# Altium PCB Flyback_Converter_New.PcbDoc
Units mil, origin at the board's own origin, x right, y up, seen from the top; angles counter-clockwise.
Board outline 3780.03 x 2215.03 mil, 2 copper layers (Top Layer, Bottom Layer); 31 components, 15 nets, 79 pads, 0 vias.
Unrouted connection lines stored in the file: 3.
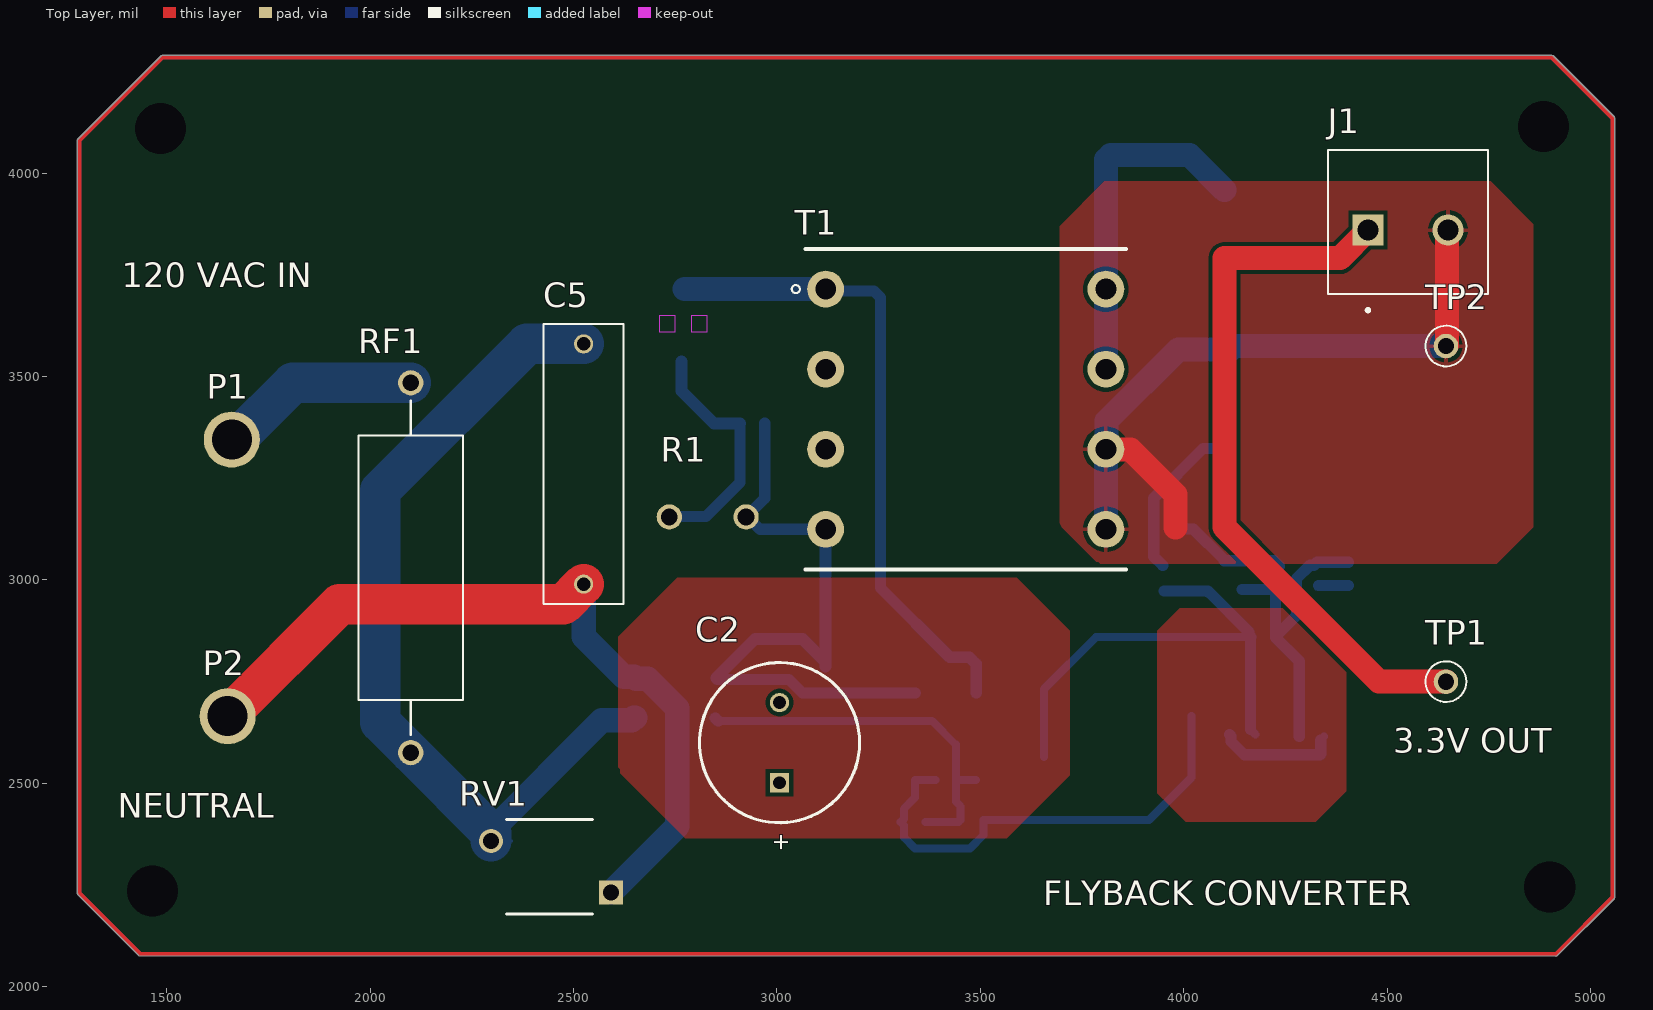
[diagram p0: Top Layer view]
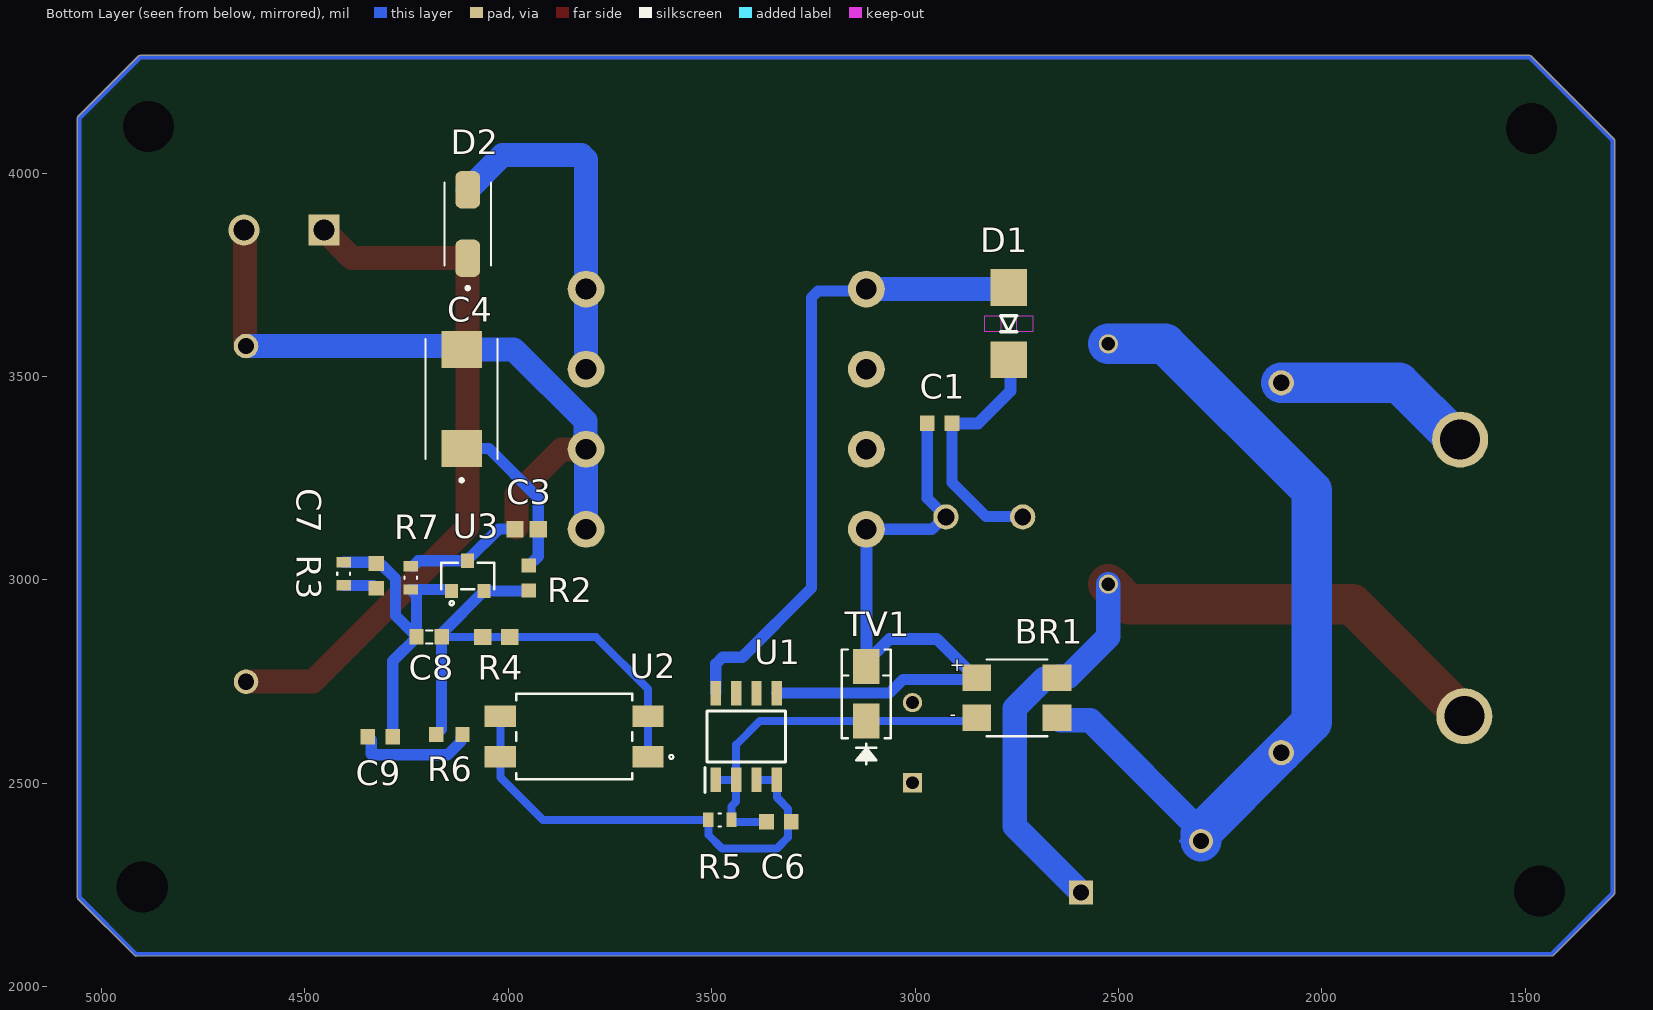
[diagram p1: Bottom Layer view, seen from below]
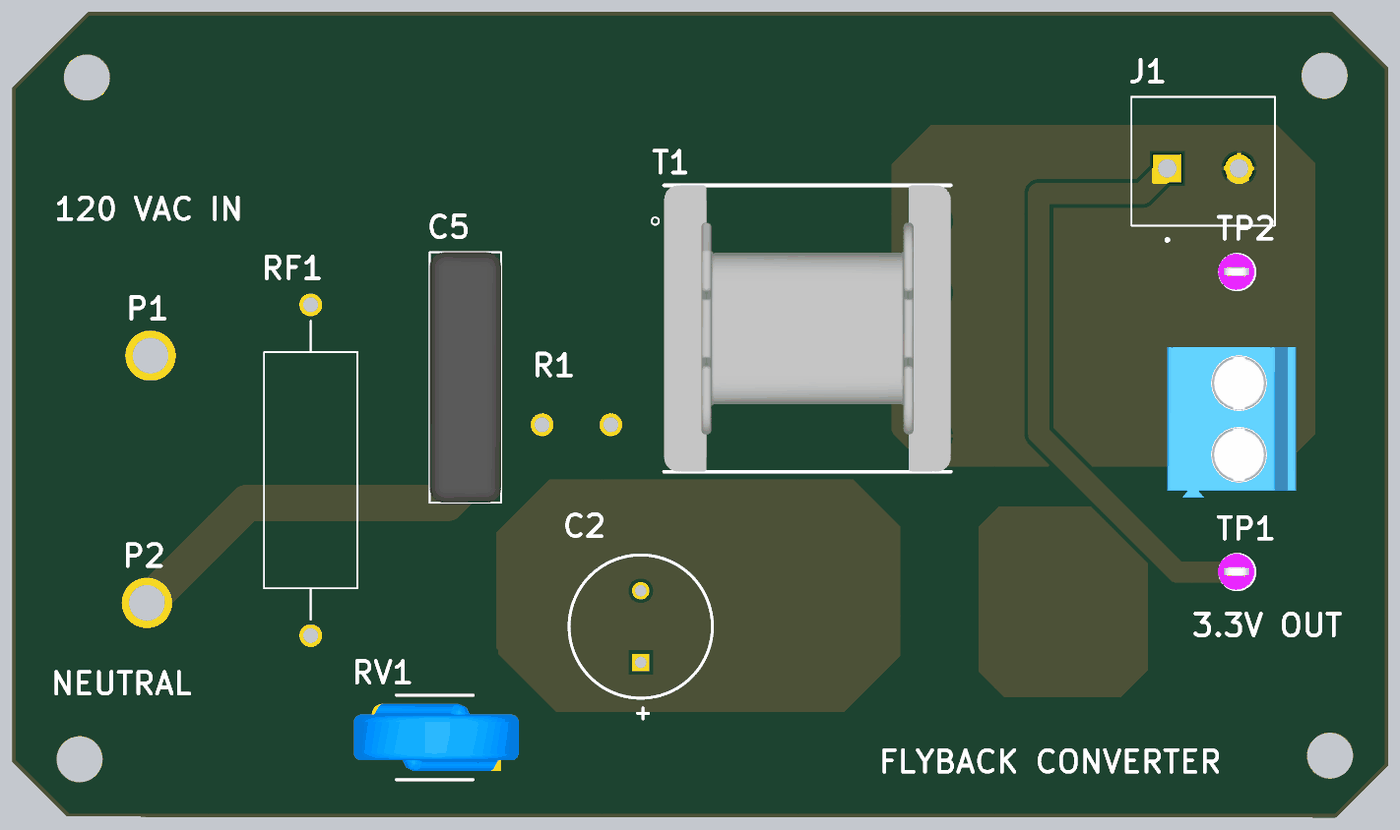
[diagram p2: 3D render of the assembled board from above, using the file's embedded part models]
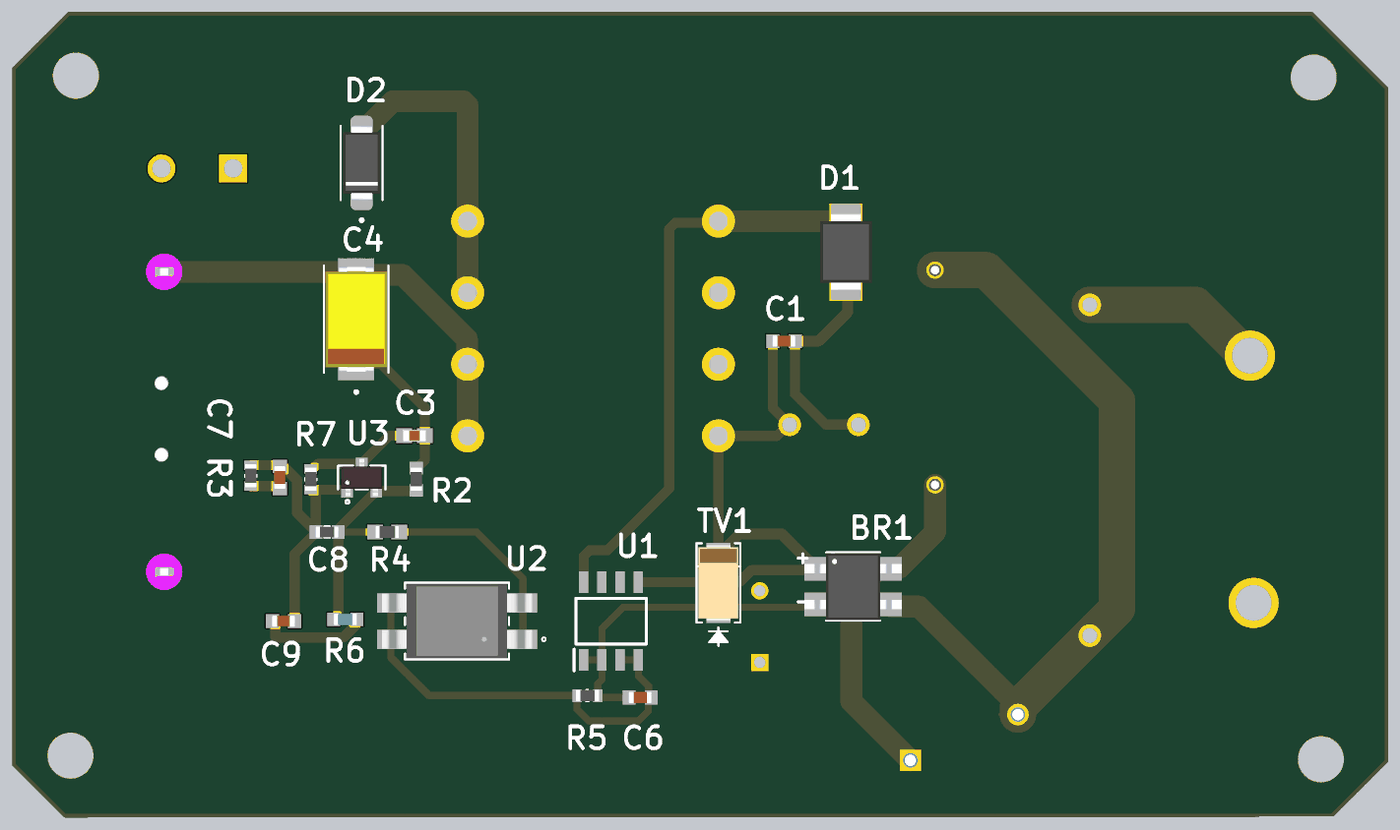
[diagram p3: 3D render of the assembled board from below, using the file's embedded part models]

## Layer stack, top to bottom
Top Solder: solder mask 0.4, Solder Resist, Dk 3.5
Top Layer: signal copper 1.4
Dielectric 1: dielectric 12.6, FR-4, Dk 4.8
Bottom Layer: signal copper 1.4
Bottom Solder: solder mask 0.4, Solder Resist, Dk 3.5

## Board outline
1431.45,2076.45 1281.45,2226.45 1279.98,2230 1279.98,4080 1281.45,4083.55 1486.45,4288.55 1490,4290.02 4905,4290.02 4908.55,4288.55 5058.55,4138.55 5060.02,4135 5060.02,2220 5058.55,2216.45 4918.55,2076.45 4915,2074.99

## Design rules (kind name [scope] priority, off if disabled: settings)
Clearance [All] p1: gap=10 ignorepadtopadclearanceinfootprint=FALSE
PolygonConnect [All] p1: connectstyle=Relief reliefconductorwidth=10 reliefentries=4 polygonreliefangle="90 Angle" airgapwidth=10
RoutingVias [All] p1: holewidth=28 width=50 viastyle="Through Hole" minholewidth=28 minwidth=50 maxholewidth=28 maxwidth=50
SolderMaskExpansion [All] p1: expansion=0 istentingtop=FALSE
SupplyNets "Schematic Supply Nets_2" [InNet('3.3V')] p1: voltage=0.000
SupplyNets "Schematic Supply Nets_1" [InNet('GND-P')] p2: voltage=0.000
SupplyNets "Schematic Supply Nets" [InNet('GND')] p3: voltage=0.000
Width [All] p1 off: maxlimit=10 minlimit=10 preferedwidth=10
30 further rules are at their usual default settings.

## Components (designator, comment, footprint, x,y, rotation, side; value= is the part's Value field where it differs from the comment)
BR1 "HD06-T" DIOB_HD06-T 2750,2710 r180 bottom value=600V
C1 "1.5nF" CAPC1608X87N 2940,3385 r0 bottom
C2 "10 uF" "450BXW10MEFR10X16 - duplicate" 3006.57,2600 r90 top
C3 "10 uF" CAPC1608X120N 3955,3125 r180 bottom
C4 "680 uF" CAPPM7343X310N 4115,3445 r90 bottom
C5 "100 nF" CAPRR1500W60L1750T500H1200 2525,3285 r90 top
C6 "0.1 uF" CAPC1608X90N#1 3335,2405 r180 bottom
C7 "1000 pF" CAPC1608X90N#2 4325,3010 r270 bottom
C8 "DNP" CAPC1608X95 4195,2860 r180 bottom
C9 "2200 pF" CAPC1608X87N 4315,2615 r180 bottom
D1 "MURS160-13-F" MURS160-13-F 2770,3630 r90 bottom
D2 "B340A-13-F" DIOM5226X240N 4100,3875 r90 bottom
J1 "TB001-500-P02BE" CUI_TB001-500-P02BE 4453.15,3860 r0 top
P1 "14 Gauge PAD" PAD_1.6MM_WIRE 1660,3345 r0 top
P2 "14 Gauge PAD" PAD_1.6MM_WIRE 1650,2665 r0 top
R1 "56K" RESAD2950W85L1150D450 2830,3155 r0 top
R2 "1K" RESC1608X55N#1 3950,3005 r90 bottom
R3 "130K" RES_ERJS03F1303V 4405,3015 r270 bottom
R4 "22.1K" 0603 4030,2860 r180 bottom
R5 "22.1K" RES_ERJ3EKF2212V 3480,2410 r180 bottom
R6 "10K" RESC1608X55N#2 4145,2620 r180 bottom
R7 "78.7K" RES_ERJ3EKF7872V 4240,3005 r270 bottom
RF1 "10R" FKN3WSJT-73-10R 2100,3030 r90 top
RV1 "" B72210P2271K101 2445,2295 r180 top
T1 "CUSTOM" TRANSFORMER_EFD20/10/7 3464.49,3419.72 r270 top
TP1 "3.3V" KEYSTONE_5269 4645,2750 r0 top
TP2 "GND" KEYSTONE_5269 4645,3575 r0 top
TV1 "SMBJ250A" "DIODE DO-214AC" 3120,2720 r90 bottom
U1 "UCC28881DR" SOIC127P600X175-8N 3415,2615 r90 bottom
U2 "LTV-817S-TA1-D" LTV-817S_LTO 3838.14,2615 r0 bottom
U3 "LMV431AIMF" SOT-23 4100,3010 r180 bottom

## Footprints (in the part's own frame and the unit in brackets; to place one, negate y for a bottom-side part, rotate by r counter-clockwise, add the part's x,y. Pads: shape width x height; smd on the part's side, far side on the other; paste and mask are expansions set on the pad)
"450BXW10MEFR10X16 - duplicate" [mm]
  rect 1.2x1.2 / inner round 1.2 / far side rect 1.2x1.2 hole 0.8: 1(-2.5,0)
  round 1.2 hole 0.8: 2(2.5,0)
  silkscreen extent -5,-5 5,5, body extent -5,-5 5,5, height 16
0603 [mm]
  rect 1.1x1 smd paste+0 mask+0.102: 1(-0.85,0) 2(0.85,0)
  body extent -0.8,-0.4 0.8,0.4, height 0.55
B72210P2271K101 [mm]
  rect 1.5x1.5 / inner round 0 / far side rect 1.5x1.5 hole 1: 1(-3.75,1.6)
  round 1.5 / inner round 0 / far side round 1.5 hole 1: 2(3.75,-1.6)
  silkscreen extent -2.58,-2.95 2.79,2.95, body extent -5.75,-2.35 5.75,2.35, height 12.75
CAPC1608X87N [mm]
  rect 0.92x0.97 smd paste+0 mask+0.102: 1(-0.775,0) 2(0.775,0)
  body extent -0.8,-0.4 0.8,0.4, height 0.87
CAPC1608X90N#1 [mm]
  rect 0.92x0.97 smd: 1(-0.775,0) 2(0.775,0)
  body extent -0.8,-0.4 0.8,0.4, height 0.95
CAPC1608X90N#2 [mm]
  rect 0.92x0.98 smd paste+0 mask+0.102: 1(-0.775,0) 2(0.775,0)
  body extent -0.8,-0.41 0.8,0.41, height 0.9
CAPC1608X95 [mm]
  rect 0.9x0.97 smd: 1(-0.785,0) 2(0.785,0)
  silkscreen extent -0.2,-0.4 0.2,0.4, body extent -0.8,-0.4 0.8,0.4, height 0.95
CAPC1608X120N [mm]
  rect 1.07x1.02 smd paste+0 mask+0.102: 1(-0.72,0) 2(0.72,0)
  body extent -0.8,-0.4 0.8,0.4, height 1.2
CAPPM7343X310N [mm]
  rect 2.31x2.52 smd: 1(-3.1,0) 2(3.1,0)
  silkscreen extent -5.18,-2.25 3.75,2.25, body extent -3.65,-2.15 3.65,2.15, height 4.3
CAPRR1500W60L1750T500H1200 [mm]
  round 1.2 hole 0.85: 1(-7.5,0) 2(7.5,0)
  silkscreen extent -8.75,-2.5 8.75,2.5, body extent -8.75,-2.5 8.75,2.5, height 12
CUI_TB001-500-P02BE [mm]
  rect 1.95x1.95 / inner round 1.95 / far side rect 1.95x1.95 hole 1.3 mask+0.102: 1(0,0)
  round 1.95 hole 1.3 mask+0.102: 2(5,0)
  silkscreen extent -2.5,-5.1 7.5,5, body extent 0,-23 9,-12.5, height 12.5
DIOB_HD06-T [mm]
  rect 1.8x1.65 smd: AC1(2.5,1.25) AC2(2.5,-1.25) NEG(-2.5,-1.25) POS(-2.5,1.25)
  silkscreen extent -1.9,-2.39 1.9,2.39, body extent -3.4,-2.35 3.4,2.35, height 3
"DIODE DO-214AC" [mil]
  rect 86x65 smd: 1(67.01,0.01) 2(-66.99,0.01)
  silkscreen extent -173,-60 109,60, body extent -104,-55 104,55, height 92
DIOM5226X240N [mm]
  rrect50% 2.33x1.55 smd: A(2.135,0) C(-2.135,0)
  silkscreen extent -4.1,-1.46 2.6,1.46, body extent -2.6,-1.3 2.6,1.3, height 2.4
FKN3WSJT-73-10R [mm]
  round 1.575 hole 1.05: 1(-11.55,0) 2(11.55,0)
  silkscreen extent -10.44,-3.25 10.44,3.25, body extent -8.25,-3.25 8.25,3.25, height 7
KEYSTONE_5269 [mm]
  round 1.53 hole 1.02: TP(0,0)
  silkscreen extent -1.27,-1.27 1.27,1.27, body extent -1.33,-1.24 1.2,1.29, height 3.17
LTV-817S_LTO [mil]
  rect 77x53 smd paste+0 mask+0: 1(-181.5,50) 2(-181.5,-50) 3(181.5,-50) 4(181.5,50)
  silkscreen extent -244,-106 143,106, body extent -206,-101 206,101, height 181
MURS160-13-F [mm]
  rect 2.3x2.3 smd paste-2: 1(-2.25,0) 2(2.25,0)
  Keep-Out Layer region: 0.5,0.5 -0.5,0.5 -0.5,1.5 0.5,1.5
  Keep-Out Layer region: 0.5,-1.5 -0.5,-1.5 -0.5,-0.5 0.5,-0.5
  silkscreen extent -0.5,-0.5 0.5,0.5, body extent -2.65,-1.81 2.65,1.81, height 2.5
PAD_1.6MM_WIRE [mm] "1 mm Probe Pad"
  round 3.5 hole 2.5: 1(0,0)
RES_ERJ3EKF2212V [mm]
  rect 0.65x0.9 smd: 1(-0.725,0) 2(0.725,0)
  silkscreen extent -0.08,-0.4 0.08,0.4, body extent -0.8,-0.4 0.8,0.4, height 0.45
RES_ERJ3EKF7872V [mm]
  rect 0.65x0.9 smd paste+0 mask+0.102: 1(-0.725,0) 2(0.725,0)
  silkscreen extent -0.08,-0.4 0.08,0.4, body extent -0.8,-0.4 0.8,0.4, height 0.45
RES_ERJS03F1303V [mm]
  rect 0.65x0.9 smd paste+0 mask+0.102: 1(-0.725,0) 2(0.725,0)
  silkscreen extent -0.08,-0.4 0.08,0.4, body extent -0.8,-0.4 0.8,0.4, height 0.45
RESAD2950W85L1150D450 [mm]
  round 1.575 hole 1.05: 1(-2.4,0) 2(2.4,0)
  body extent -2.6,-2.6 2.6,2.6, height 10
RESC1608X55N#1 [mm]
  rect 0.87x0.93 smd: 1(-0.78,0) 2(0.78,0)
  body extent -0.8,-0.4 0.8,0.4, height 0.55
RESC1608X55N#2 [mm]
  rect 0.89x0.93 smd paste+0 mask+0.102: 1(-0.814,0) 2(0.814,0)
  body extent -0.8,-0.4 0.8,0.4, height 0.55
SOIC127P600X175-8N [mm]
  rect 1.528x0.65 smd: 1(-2.711,1.905) 2(-2.711,0.635) 3(-2.711,-0.635) 4(-2.711,-1.905) 5(2.711,-1.905) 6(2.711,-0.635) 7(2.711,0.635) 8(2.711,1.905)
  silkscreen extent -3.47,-2.45 1.6,2.58
SOT-23 [mil]
  rect 32x35 smd paste+0 mask+0: 1(-40.35,-37.2) 2(40.35,-37.2) 3(0,37.2)
  silkscreen extent -65,-72 65,33, body extent -57,-51 57,51, height 45
TRANSFORMER_EFD20/10/7 [mm]
  round 2.3 hole 1.3: 1(-7.5,-8.75) 2(-2.5,-8.75) 3(2.5,-8.75) 4(7.5,-8.75) 5(7.5,8.75) 6(2.5,8.75) 7(-2.5,8.75) 8(-7.5,8.75)
  silkscreen extent -10,-10.87 10,10, body extent -10,-10 10,10, height 10.1

## Part data
BR1: "KÃ¶prÃ¼ DoÄŸrultucu Tek FazlÄ± Standart 600 V YÃ¼zey MontajlÄ± 4-MiniDIP", Package="SMD-4 Diodes Inc.", Availability="In Stock", Check_prices=https://www.snapeda.com/parts/HD06-T/Diodes+Inc./view-part/?ref=eda, MF="Diodes Inc.", MP=HD06-T, Price=None, Purchase-URL=https://pricing.snapeda.com/search/part/HD06-T/?ref=eda, SnapEDA_Link=https://www.snapeda.com/parts/HD06-T/Diodes+Inc./view-part/?ref=snap
C1: library part C0603C152K8RACTU, "Cap Ceramic 0.0015uF 10V X7R 10% SMD 0603 125Â°C Paper T/R", Package="603-2 KEMET", Check_prices=https://www.snapeda.com/parts/C0603C152K8RACTU/Kemet/view-part/?ref=eda, MF=KEMET, MP=C0603C152K8RACTU, SnapEDA_Link=https://www.snapeda.com/parts/C0603C152K8RACTU/Kemet/view-part/?ref=snap
C2: library part 450BXW10MEFR10X16, "10ÂµF 450V Aluminum Electrolytic Capacitors Radial, Can 10000 Hrs @ 105Â°C", Package="Radial Can  Rubycon", Availability=Good, Check_prices=https://www.snapeda.com/parts/450BXW10MEFR10X16/Rubycon/view-part/4800459/?ref=eda, MF=Rubycon, MP=450BXW10MEFR10X16, Price=None, Purchase-URL=https://pricing.snapeda.com/search/part/450BXW10MEFR10X16/?ref=eda, SnapEDA_Link=https://www.snapeda.com/parts/450BXW10MEFR10X16/Rubycon/view-part/4800459/?ref=snap
C3: library part ZRB18AR61E106ME01L, "SMD capacitor X5R(EIA) with capacitance 10uF Tol.20%. Rated voltage 25Vdc 85C", Package="1608 Murata", Check_prices=https://www.snapeda.com/parts/ZRB18AR61E106ME01L/Murata/view-part/?ref=eda, MF=Murata, MP=ZRB18AR61E106ME01L, SnapEDA_Link=https://www.snapeda.com/parts/ZRB18AR61E106ME01L/Murata/view-part/?ref=snap
C4: library part TPME687M006R0023, "680 ÂµF Molded Tantalum Capacitors 6.3 V 2917 (7343 Metric) 23mOhm", Package="2917 AVX", Check_prices=https://www.snapeda.com/parts/TPME687M006R0023/AVX/view-part/?ref=eda, MF=AVX, MP=TPME687M006R0023, SnapEDA_Link=https://www.snapeda.com/parts/TPME687M006R0023/AVX/view-part/?ref=snap
C5: library part ECQUAAF104SA, "Cap Film Suppression X2 0.1uF 275VAC PP 20% (17.5 X 5 X 12mm) Radial Plastic Rectangular Can 15mm 110C Automotive Bulk", Package="DIP-2 Panasonic", Availability="In Stock", Check_prices=https://www.snapeda.com/parts/ECQUAAF104SA/Panasonic/view-part/5794383/?ref=eda, MF=Panasonic, MP=ECQUAAF104SA, Price=None, SnapEDA_Link=https://www.snapeda.com/parts/ECQUAAF104SA/Panasonic/view-part/5794383/?ref=snap
C6: library part C0603C104K4RAC, "0.1 ÂµF Â±10% 16V Ceramic Capacitor X7R 0603 (1608 Metric)", Package="603-2 KEMET", Check_prices=https://www.snapeda.com/parts/C0603C104K4RAC/KEMET/view-part/?ref=eda, MF=KEMET, MP=C0603C104K4RAC, SnapEDA_Link=https://www.snapeda.com/parts/C0603C104K4RAC/KEMET/view-part/?ref=snap
C7: library part 06035A102GAT2A, "0603 1000 pF 50 V Â±2% Tolerance C0G Multilayer Ceramic Capacitor", Package="1608 AVX", Check_prices=https://www.snapeda.com/parts/06035A102GAT2A/AVX/view-part/?ref=eda, MF=AVX, MP=06035A102GAT2A, SnapEDA_Link=https://www.snapeda.com/parts/06035A102GAT2A/AVX/view-part/?ref=snap
C8: library part C1608X7R1C105K, "1 ÂµF Â±10% 16V Ceramic Capacitor X7R 0603 (1608 Metric)", Package="0603 TDK", Check_prices=https://www.snapeda.com/parts/C1608X7R1C105K/TDK/view-part/?ref=eda, MF=TDK, MP=C1608X7R1C105K, SnapEDA_Link=https://www.snapeda.com/parts/C1608X7R1C105K/TDK/view-part/?ref=snap
C9: library part C0603S222J5RACTU, "Cap Cer 2200pf 50v 5% X7r 0603", Package="1608 KEMET", Check_prices=https://www.snapeda.com/parts/C0603S222J5RACTU/Kemet/view-part/?ref=eda, MF=KEMET, MP=C0603S222J5RACTU, SnapEDA_Link=https://www.snapeda.com/parts/C0603S222J5RACTU/Kemet/view-part/?ref=snap
D1: "Diode Switching 600V 1A 2Pin SMB", Package="DO-214 Diodes Inc.", Check_prices=https://www.snapeda.com/parts/MURS160-13-F/Diodes+Inc./view-part/?ref=eda, MF="Diodes Inc.", MP=MURS160-13-F, SnapEDA_Link=https://www.snapeda.com/parts/MURS160-13-F/Diodes+Inc./view-part/?ref=snap
D2: "Schottky Diode 3A 40V 0.5Vf SMA", Package="DO-214 Diodes Inc.", Check_prices=https://www.snapeda.com/parts/B340A-13-F/Diodes+Inc./view-part/?ref=eda, MF="Diodes Inc.", MP=B340A-13-F, SnapEDA_Link=https://www.snapeda.com/parts/B340A-13-F/Diodes+Inc./view-part/?ref=snap
J1: "2~24 Poles, Screw Type, Horizontal, 5.0 Pitch, 22~12 (AWG), Terminal Block Connector", Package=None, Check_prices=https://www.snapeda.com/parts/TB001-500-P02BE/Same+Sky/view-part/?ref=eda, MF="Same Sky", MP=TB001-500-P02BE, SnapEDA_Link=https://www.snapeda.com/parts/TB001-500-P02BE/Same+Sky/view-part/?ref=snap
P1 P2: "5.2MM WIRE PAD", Manufacturer=NA, Number=NA
R1: library part CRCW1206100KJNEA, "RES 56K OHM 2W 5% AXIAL", Manufacturer="Vishay Beyschlag/Draloric/BC Components", Manufacturer Part Number=PR02000205602JR200, Supplier Part Number 1=PPC56KW-2CT-ND, Supplier 1=Digi-Key
R2: library part CR0603-FX-1001ELF, "RES SMD 1K OHM 1% 1/10W 0603 / 1 kOhms Â±1% 0.1W, 1/10W Chip Resistor 0603 (1608 Metric) Moisture Resistant Thick Film", Package="0603-2 Bourns", Check_prices=https://www.snapeda.com/parts/CR0603FX1001ELF/Bourns/view-part/?ref=eda, MF="Bourns Electronics", MP=CR0603FX1001ELF, SnapEDA_Link=https://www.snapeda.com/parts/CR0603FX1001ELF/Bourns/view-part/?ref=snap
R3: library part ERJS03F1303V, "Res Thick Film 0603 130K Ohm 1% 1/10W Â±100ppm/Â°C Molded SMD SMD Punched Carrier T/R", Package="1608-2 Panasonic", Check_prices=https://www.snapeda.com/parts/ERJS03F1303V/Panasonic/view-part/?ref=eda, MF=Panasonic, MP=ERJS03F1303V, SnapEDA_Link=https://www.snapeda.com/parts/ERJS03F1303V/Panasonic/view-part/?ref=snap
R4: library part RC0603FR-0722R1L, "22.1 Ohms Â±1% 0.1W, 1/10W Chip Resistor 0603 (1608 Metric) Moisture Resistant Thick Film", Package="SMD-2 Yageo", Check_prices=https://www.snapeda.com/parts/RC0603FR-0722R1L/Yageo/view-part/?ref=eda, MF=Yageo, MP=RC0603FR-0722R1L, SnapEDA_Link=https://www.snapeda.com/parts/RC0603FR-0722R1L/Yageo/view-part/?ref=snap
R5: library part ERJ3EKF2212V, "Resistor Thick Film 0603 22.1k Ohm 1% 1/10 Watt 100ppm C Surface Mount Punched Carrier Tape and Reel", Package="1608-2 Panasonic", Check_prices=https://www.snapeda.com/parts/ERJ-3EKF2212V/Panasonic+Electronic+Components/view-part/?ref=eda, MF=Panasonic, MP=ERJ-3EKF2212V, SnapEDA_Link=https://www.snapeda.com/parts/ERJ-3EKF2212V/Panasonic+Electronic+Components/view-part/?ref=snap
R6: library part RK73G1JTTD1002F, Package=None, Availability=Unavailable, MP=RK73G1JTTD1002F, Price=None
R7: library part ERJ3EKF7872V, "Res Thick Film 0603 78.7K Ohm 1% 1/10W 100ppm/C Molded SMD SMD Punched Carrier T/R", Package="1608-2 Panasonic", Check_prices=https://www.snapeda.com/parts/ERJ-3EKF7872V/Panasonic+Electronic+Components/view-part/?ref=eda, MF=Panasonic, MP=ERJ-3EKF7872V, SnapEDA_Link=https://www.snapeda.com/parts/ERJ-3EKF7872V/Panasonic+Electronic+Components/view-part/?ref=snap
RF1: library part FW30A10R0JA, "Res Fusible Wirewound 10 Ohm 5% 3W ±350ppm/°C Conformal Axial Ammo Pack", Case/Package=Axial, Manufacturer=Bourns, Max Operating Temperature=155°C, Max Power Dissipation=3W, Min Operating Temperature=-40°C, Package Quantity=1, Resistor Type=Wirewound, Supplier Part Number 1=FW30A10R0JACT-ND, Temperature Coefficient=350ppm/°C, Tolerance=5%, Category="Through-Hole Resistors", ComponentLink1Description=http://www.yageo.com/NewPortal/yageodocoutput?fileName=/pdf/throughhole/Yageo_LR_FKN_2013.pdf&src-supplier=Digi-Key, ComponentLink1URL=http://www.yageo.com/NewPortal/yageodocoutput?fileName=/pdf/throughhole/Yageo_LR_FKN_2013.pdf&src-supplier=Digi-Key, ComponentLink2Description=http://www.yageo.com/documents/recent/Yageo%20LR_FKN_2013.pdf?src-supplier=Digi-Key, ComponentLink2URL=http://www.yageo.com/documents/recent/Yageo%20LR_FKN_2013.pdf?src-supplier=Digi-Key, Length=0.61inch, Manufacturer Part Number=FW30A10R0JA, Number of Terminations=2, Packaging="Cut Tape", Pricing="1=0.52000, 10=0.37000, 25=0.28840, 50=0.24380, 100=0.19210, 250=0.16260, 500=0.13302 (USD)", RoHS=Yes, RoHS Compliant=Yes, Stock=18600, Supplier 1=Digi-Key
RV1: library part B72210P2271K101, Package=None, Check_prices=https://www.snapeda.com/parts/B72210P2271K101/TM+Electronics/view-part/?ref=eda, MF="TDK ELECTRONICS", MP=B72210P2271K101, SnapEDA_Link=https://www.snapeda.com/parts/B72210P2271K101/TM+Electronics/view-part/?ref=snap
T1: library part TRANSFORMER, "Core Type: EFD20/10/7  Core Material: N49  Turns Ratio(Nps): 69:4", Manufacturer=CUSTOM, Manufacturer Part Number=CUSTOM
TP1 TP2: library part 5269, "TEST POINT (PURPLE) - MINIATURE", Package=None, Check_prices=https://www.snapeda.com/parts/5269/Keystone/view-part/?ref=eda, MF="Keystone Electronics", MP=5269, SnapEDA_Link=https://www.snapeda.com/parts/5269/Keystone/view-part/?ref=snap
TV1: "405V Clamp 1.5A Ipp Tvs Diode Surface Mount DO-214AA (SMBJ)", Package="DO-214 Littelfuse", Check_prices=https://www.snapeda.com/parts/SMBJ250A/Littelfuse/view-part/?ref=eda, MF=Littelfuse, MP=SMBJ250A, SnapEDA_Link=https://www.snapeda.com/parts/SMBJ250A/Littelfuse/view-part/?ref=snap
U1: "700-V Lowest Quiescent Current Off-Line Switcher", Manufacturer_Name="Texas Instruments", Mouser Part Number=595-UCC28881DR, Arrow Part Number=UCC28881DR, Arrow Price/Stock=https://www.arrow.com/en/products/ucc28881dr/texas-instruments, Datasheet Link=http://www.ti.com/lit/ds/symlink/ucc28881.pdf, Geometry.Height=1.75mm, Manufacturer_Part_Number=UCC28881DR, Mouser Price/Stock=https://www.mouser.co.uk/ProductDetail/Texas-Instruments/UCC28881DR?qs=8%2FmU9qzJpL9X%252BEjLm6T16Q%3D%3D
U2: "Transistor Output Optocouplers Optocoupler 50% 5kv 4Pin SMT Voltage - Output (Max) 35V Current - Output / Channel 50mA Voltage - Forward (Vf) (Typ) 1.2V Current - DC Forward (If) (Max) 50 mA Vce Saturation (Max) 200mV Operating Temperature -55C ~ 110C", Manufacturer_Name=Lite-On, Mouser Part Number=859-LTV-817S-TA1-D, Arrow Part Number=LTV-817S-TA1-D, Arrow Price/Stock=https://www.arrow.com/en/products/ltv-817s-ta1-d/lite-on-technology.html?utm_currency=USD&region=nac, Datasheet Link=http://optoelectronics.liteon.com/upload/download/DS-70-96-0016/LTV-8X7%20series%20201610%20.pdf, Geometry.Height=4.6mm, Manufacturer_Part_Number=LTV-817S-TA1-D, Mouser Price/Stock=https://www.mouser.co.uk/ProductDetail/LITEON/LTV-817S-TA1-D?qs=WAWaI72GHKywq5dxGALi%252BQ%3D%3D
U3: "Voltage References NRND, alternate is LMV431AIMF/NOPB", Manufacturer_Name="Texas Instruments", Mouser Part Number=926-LMV431AIMF, Arrow Part Number=LMV431AIMF, Arrow Price/Stock=https://www.arrow.com/en/products/lmv431aimf/texas-instruments?utm_currency=USD&region=nac, Datasheet Link=http://www.ti.com/lit/ds/symlink/lmv431.pdf, Geometry.Height=1.12mm, Manufacturer_Part_Number=LMV431AIMF, Mouser Price/Stock=https://www.mouser.co.uk/ProductDetail/Texas-Instruments/LMV431AIMF?qs=7lkVKPoqpbZM%2FlKYz0jxmQ%3D%3D

## Free pads (board coordinates)
  round 60 hole 125.98: ""(1465,2235) ""(1485,4110) ""(4885,4115) ""(4900,2245)

## Nets (pads, with @x,y where several pads share a name; then routed paths per layer and width w, separated by ;. In a path a pad name is that pad's centre, name@x,y a point inside that pad or via, vN(x,y) a via of type N, cw(c..) or ccw(c..) an arc to the next point about the centre after c; other vN are vias at no path point)
3.3V: C7.2 R3.2 | length 82.9
  Bottom Layer w10: C7.2 C7.2@4331.97,2986.46
  Bottom Layer w27.56: C7.2@4331.97,2986.46 R3.2
GND: C3.1 C4.2 J1.2 R7.1 T1.5 T1.6 TP2.TP U3.3 | length 2052.4
  Top Layer w10: T1.6 T1.6@3809.53,3320.75
  Top Layer w59.06: T1.6@3809.53,3320.75 3869.25,3320.75 3980,3210 3980,3128.35 ; TP2.TP@4647.5,3577.5 J1.2@4647.5,3857.5
  Bottom Layer w10: C3.1@3980,3128.35 C3.1 ; U3.3 U3.3@4100,3048.7 ; R7.1@4235.08,3033.54 R7.1 ; TP2.TP TP2.TP@4647.5,3577.5 ; J1.2@4647.5,3857.5 J1.2
  Bottom Layer w27.56: C3.1 4023.7,3125 U3.3@4100,3048.7 ; U3.3 4221.42,3047.2 R7.1@4235.08,3033.54
  Bottom Layer w59.06: T1.5 T1.6 3810.73,3323.06 3810.73,3390.73 3987.05,3567.05 C4.2 ; C4.2@4122.95,3575 TP2.TP
GND-P: BR1.AC1 C5.1 P2.1 RV1.1 | length 1961.7
  Top Layer w100: P2.1 1925,2940 2475.28,2940 C5.1
  Bottom Layer w60: C5.1 2525,2860 2623.31,2761.69 2649.09,2761.69 BR1.AC1 2654.05,2756.73 2682.91,2756.73 2755,2684.64 2755,2394.37 RV1.1
NetBR1_AC2: BR1.AC2 C5.2 RF1.1 RV1.2 | length 2188.6
  Bottom Layer w10: 2098.72,2621.28 2098.72,2576.56 RF1.1 ; RV1.2 2345.82,2357.99
  Bottom Layer w60: RV1.2@2297.36,2382.36 2570,2655 2642.83,2655 2648.62,2660.79 BR1.AC2
  Bottom Layer w100: RV1.2 2297.36,2377.92 RF1.1 2025,2650.28 2025,3220 2385.28,3580.28 C5.2
NetBR1_NEG: BR1.NEG C6.1 R5.2 TV1.2 U1.1 U1.2 | length 943.9
  Bottom Layer w10: 2981.58,2653.21 2981.77,2653.01 ; R5.2@3446.46,2405 R5.2
  Bottom Layer w19.68: BR1.NEG@2856.01,2653.21 2981.58,2653.21 ; 2981.77,2653.01 TV1.2 3381.99,2653.01 3440,2595 U1.2 ; C6.1 R5.2@3446.46,2405 ; U1.2@3440,2506.94 3440,2455 3451.46,2443.54 R5.2 ; U1.2@3441.33,2508.27 U1.1
  Bottom Layer w27.56: BR1.NEG BR1.NEG@2856.01,2653.21
NetBR1_POS: BR1.POS C1.2 R1.2 T1.4 TV1.1 U1.5 | length 1644.4
  Bottom Layer w10: BR1.POS BR1.POS@2852.64,2755 ; R1.2 R1.2@2928.45,3155 ; TV1.1 TV1.1@3120.01,2797.51
  Bottom Layer w27.56: BR1.POS@2852.64,2755 3030,2755 3063.27,2721.73 U1.5 ; R1.2 2970.51,3201.02 C1.2 ; R1.2@2928.45,3155 2959,3124.45 T1.4
  Bottom Layer w29.53: BR1.POS@2851.38,2759.21 2947.17,2855 3062.52,2855 TV1.1@3120.01,2797.51 ; TV1.1 T1.4
NetC1_1: C1.1 D1.1 R1.1 | length 610.6
  Bottom Layer w10: R1.1 R1.1@2736.17,3155.66 ; D1.1@2765,3536.42 D1.1
  Bottom Layer w27.56: R1.1@2736.17,3155.66 2825.66,3155.66 2909.49,3239.49 C1.1
  Bottom Layer w29.53: D1.1@2765,3536.42 2765,3465 2845,3385 C1.1
NetC3_2: C3.2 C4.1 D2.C J1.1 R2.2 TP1.TP | length 2202.2
  Top Layer w10: 4100,3790.94 4120,3770.94 ; TP1.TP TP1.TP@4651.89,2756.89
  Top Layer w59.06: J1.1 4384.09,3790.94 4100,3790.94 4100,3130 4480,2750 TP1.TP
  Bottom Layer w10: 3926.65,3057.87 3926.65,3059.06 ; R2.2@3948.82,3035.71 R2.2 ; C4.1 C4.1@4119.13,3322.95
  Bottom Layer w27.56: 3926.65,3057.87 R2.2@3948.82,3035.71 ; 3926.65,3059.06 C3.2 3926.65,3201.65 4047.95,3322.95 C4.1
NetC6_2: C6.2 R5.1 U1.3 U1.4 U2.3 U2.4 | length 1171.1
  Bottom Layer w10: U1.4@3340,2507.8 U1.4@3340.47,2508.27
  Bottom Layer w19.68: U1.4@3340,2507.8 3340,2465 3312.04,2437.04 3312.04,2412.55 C6.2 3312.76,2396.73 3312.76,2367.24 3340,2340 3475,2340 3508.54,2373.54 R5.1 3915,2410 4019.64,2514.64 U2.4 U2.3 ; U1.4@3340.47,2508.27 U1.3
NetC7_1: C7.1 C8.1 C9.2 R3.1 R7.2 U3.1 | length 797.3
  Bottom Layer w10: U3.1 U3.1@4144.02,2976.46 ; C7.1 C7.1@4328.03,3043.54
  Bottom Layer w27.56: U3.1@4144.02,2976.46 R7.2 4225.91,2962.36 4225.91,2861.38 4277.56,2913.03 4277.56,3003.08 4310.66,3036.18 4320.67,3036.18 C7.1 ; C8.1@4225.91,2858.62 4284.49,2800.04 C9.2 ; C7.1@4328.03,3043.54 R3.1
NetC8_2: C8.2 R2.1 R4.1 R4.2 R6.1 U2.1 U2.2 U3.2 | length 1236.5
  Bottom Layer w10: R2.1 R2.1@3951.5,2972.8
  Bottom Layer w19.68: U2.1 U2.2 3656.64,2731.64 3785,2860 R4.2 R4.1 C8.2@4160.16,2860 ; R6.1@4164.09,2632.95 R6.1
  Bottom Layer w27.56: R2.1@3951.5,2972.8 U3.2 4059.65,2971.3 4061.87,2969.07 4063.37,2969.07 4160.16,2872.28 4160.16,2865.31 C8.2@4165.47,2860 ; R6.1@4164.09,2632.95 C8.2
NetC9_1: C9.1 R6.2 | length 299.7
  Bottom Layer w19.68: 4335,2570 4337.24,2572.24 ; C9.1@4337.24,2606.73 C9.1
  Bottom Layer w27.56: R6.2 4116.69,2616.26 4116.69,2603.31 4150,2570 4335,2570 ; 4337.24,2572.24 C9.1@4337.24,2606.73
NetD1_2: D1.2 T1.1 U1.8 | length 1546
  Bottom Layer w10: D1.2 D1.2@2773.58,3715
  Bottom Layer w27.56: 3165.51,3710.28 3238.86,3710.28 3255,3694.13 3255,2980 3425,2810 3473.86,2810 3490,2793.86 U1.8
  Bottom Layer w59.06: D1.2@2773.58,3715 T1.1
NetD2_A: D2.A T1.7 T1.8 | length 846.5
  Bottom Layer w10: 3808.98,4033.12 3820.86,4045
  Bottom Layer w59.06: T1.7 T1.8 3808.98,4033.12 ; 3820.86,4045 4014.06,4045 D2.A
NetP1_1: P1.1 RF1.2 | length 497.9
  Bottom Layer w10: P1.1 P1.1@1670.54,3345
  Bottom Layer w100: P1.1@1670.54,3345 1810.27,3484.73 RF1.2
pads on no net: C2.1 C2.2 T1.2 T1.3 U1.6 U1.7

## Polygon pours and split planes (outlines as drawn)
GND on Top Layer "GND_L01_P003" (solid, pour order 3): 2615,2525 2775,2365 3565,2365 3720,2520 3720,2875 3590,3005 2755,3005 2610,2860 2610,2540 2615,2535
GND on Top Layer "GND_L01_P002" (solid, pour order 2): 3935,2475 4005,2405 4325,2405 4400,2480 4400,2870 4340,2930 3990,2930 3935,2875
GND on Top Layer "GND" (solid, pour order 1): 3700,3130 3785,3045 3790,3045 3795,3040 4770,3040 4860,3130 4860,3875 4755,3980 3805,3980 3695,3870 3695,3140

## Other copper
Multi-Layer:
  lines w10: 1500,4285 4905,4285 ; 1510,4285 1490,4285 ; 1435,2080 1285,2230 1285,4080 1490,4285 ; 1435,2080 4915,2080 ; 1435,2080 1600,2080 4915,2080 ; 1490,4285 4905,4285 ; 4905,4285 5055,4135 ; 4915,2080 5055,2220 ; 5055,2220 5055,4135 ; 5055,2220 5055,4135

## Silkscreen, mask and mechanical layers (free items; w line width, h text height)
Top Overlay:
  text "120 VAC IN" at 1390,3720 h60
  text "3.3V OUT" at 4515,2575 h60
  text "NEUTRAL" at 1380,2415 h60
  text "FLYBACK CONVERTER" at 3655,2200 h60

## Text inside footprints (layer, text, board x,y; h text height)
BR1: Mechanical 13 "+" at 2915,2775 h32; Mechanical 13 "-" at 2915,2655 h32; Bottom Overlay "+" at 2915,2775 h32; Bottom Overlay "-" at 2915,2655 h32
C2: Top Overlay "+" at 3028.57,2331.24 h40 r90